# Altium PCB st_V1.PcbDoc
Units mil, origin at the board's own origin, x right, y up, seen from the top; angles counter-clockwise.
Board outline 3400 x 4549.85 mil, 2 copper layers (Top Layer, Bottom Layer); 43 components, 29 nets, 125 pads, 18 vias.
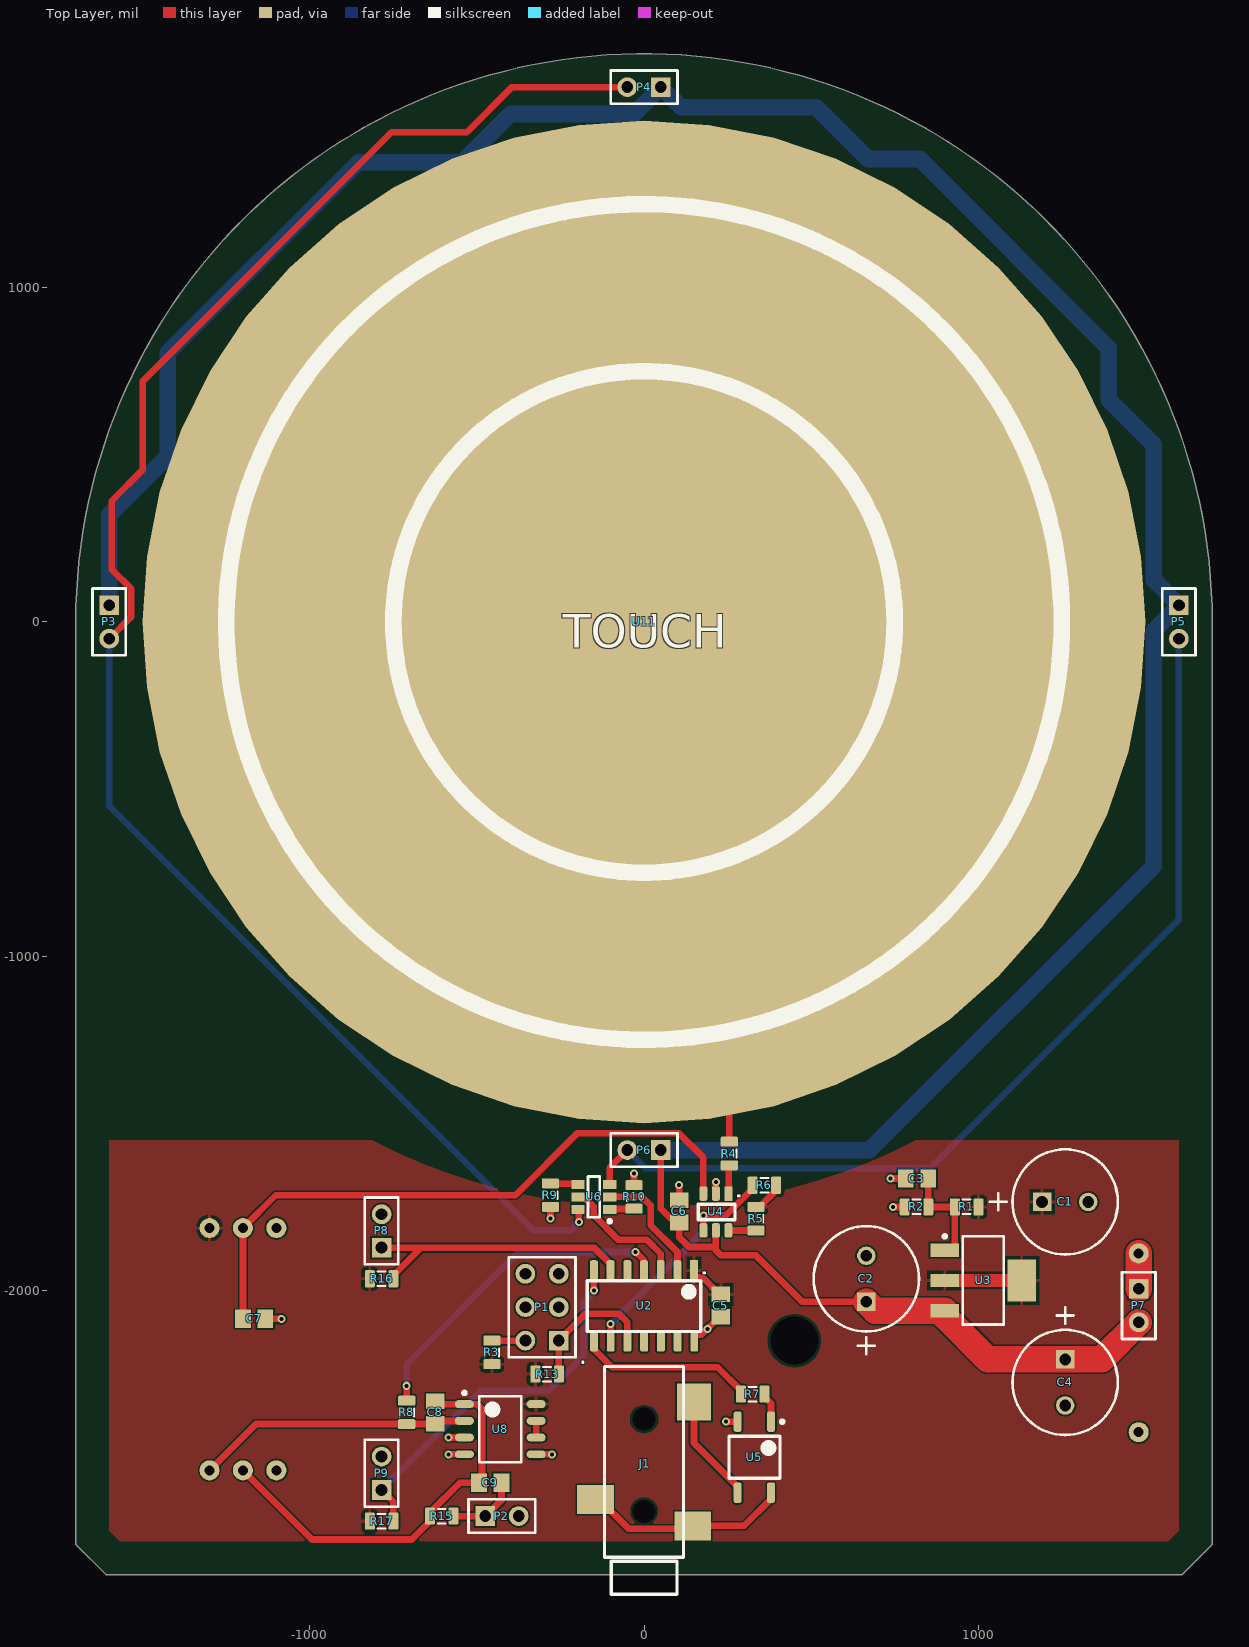
[diagram p0: Top Layer view]
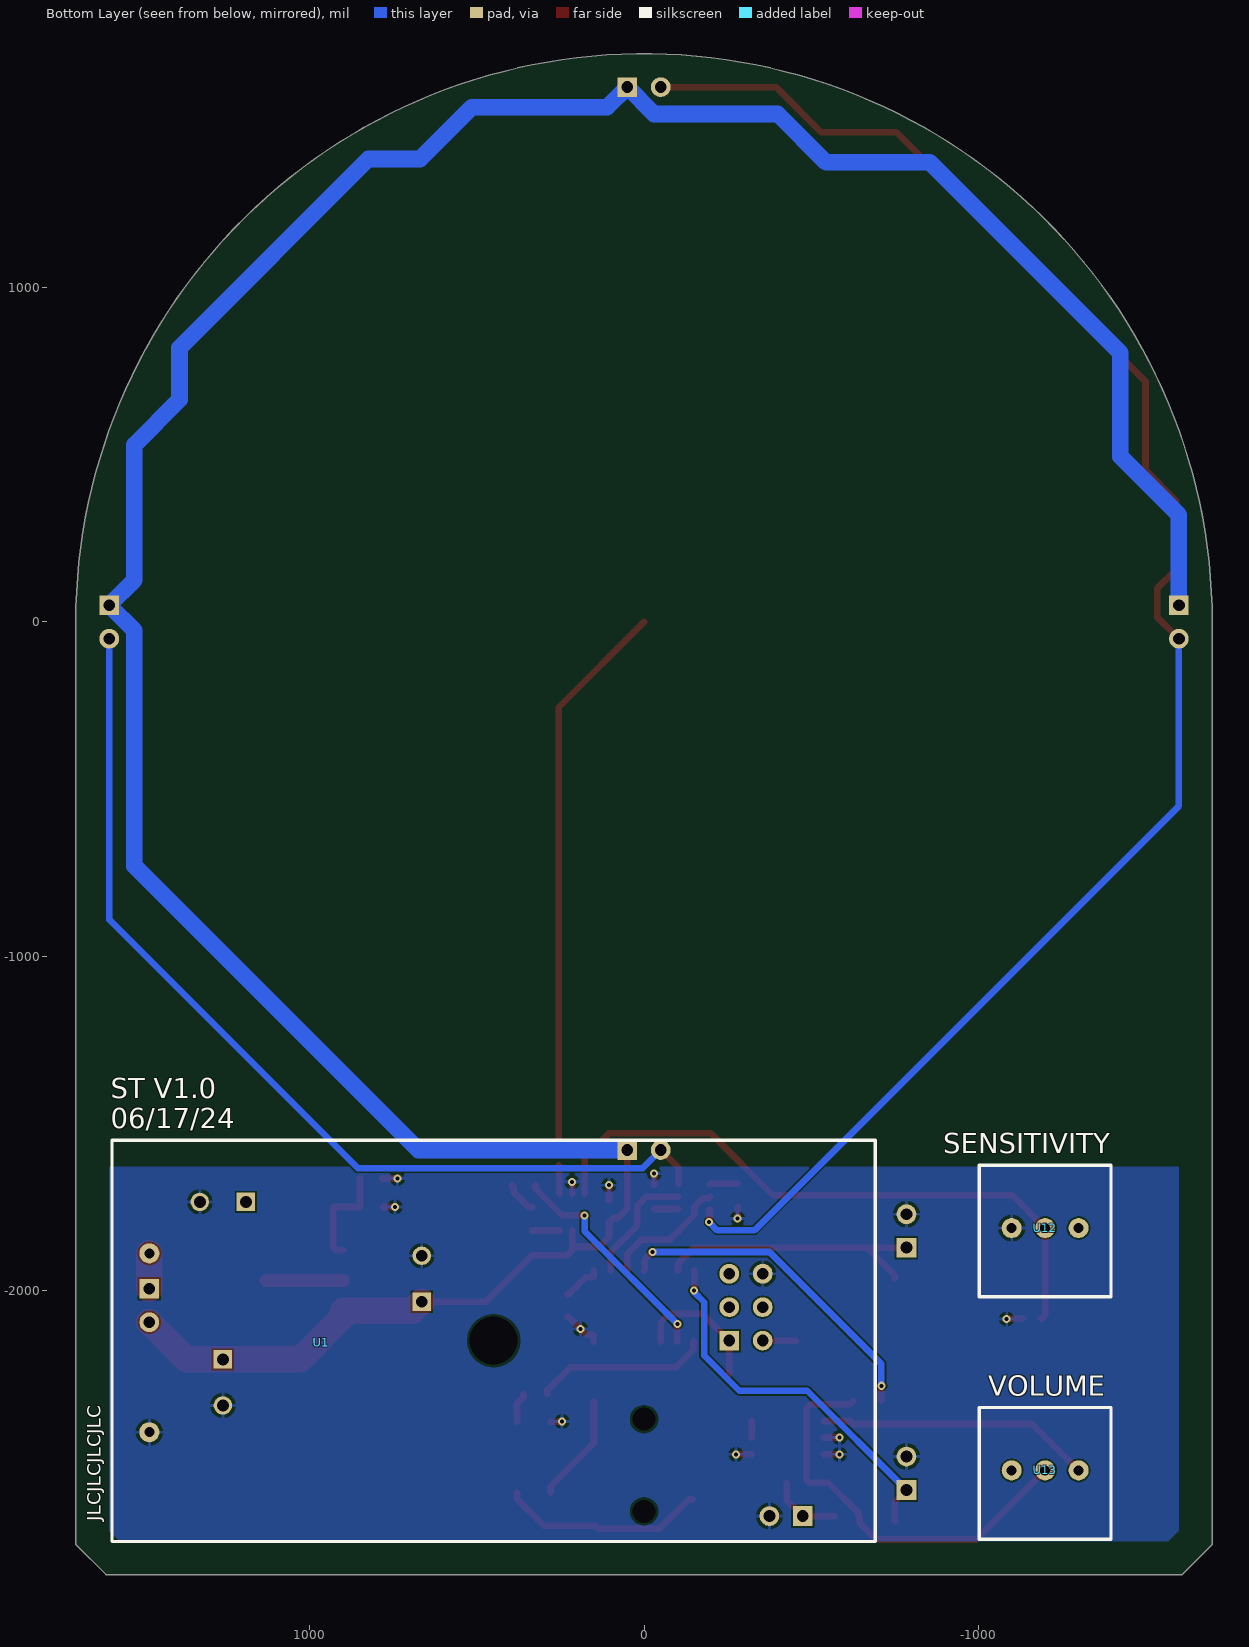
[diagram p1: Bottom Layer view, seen from below]
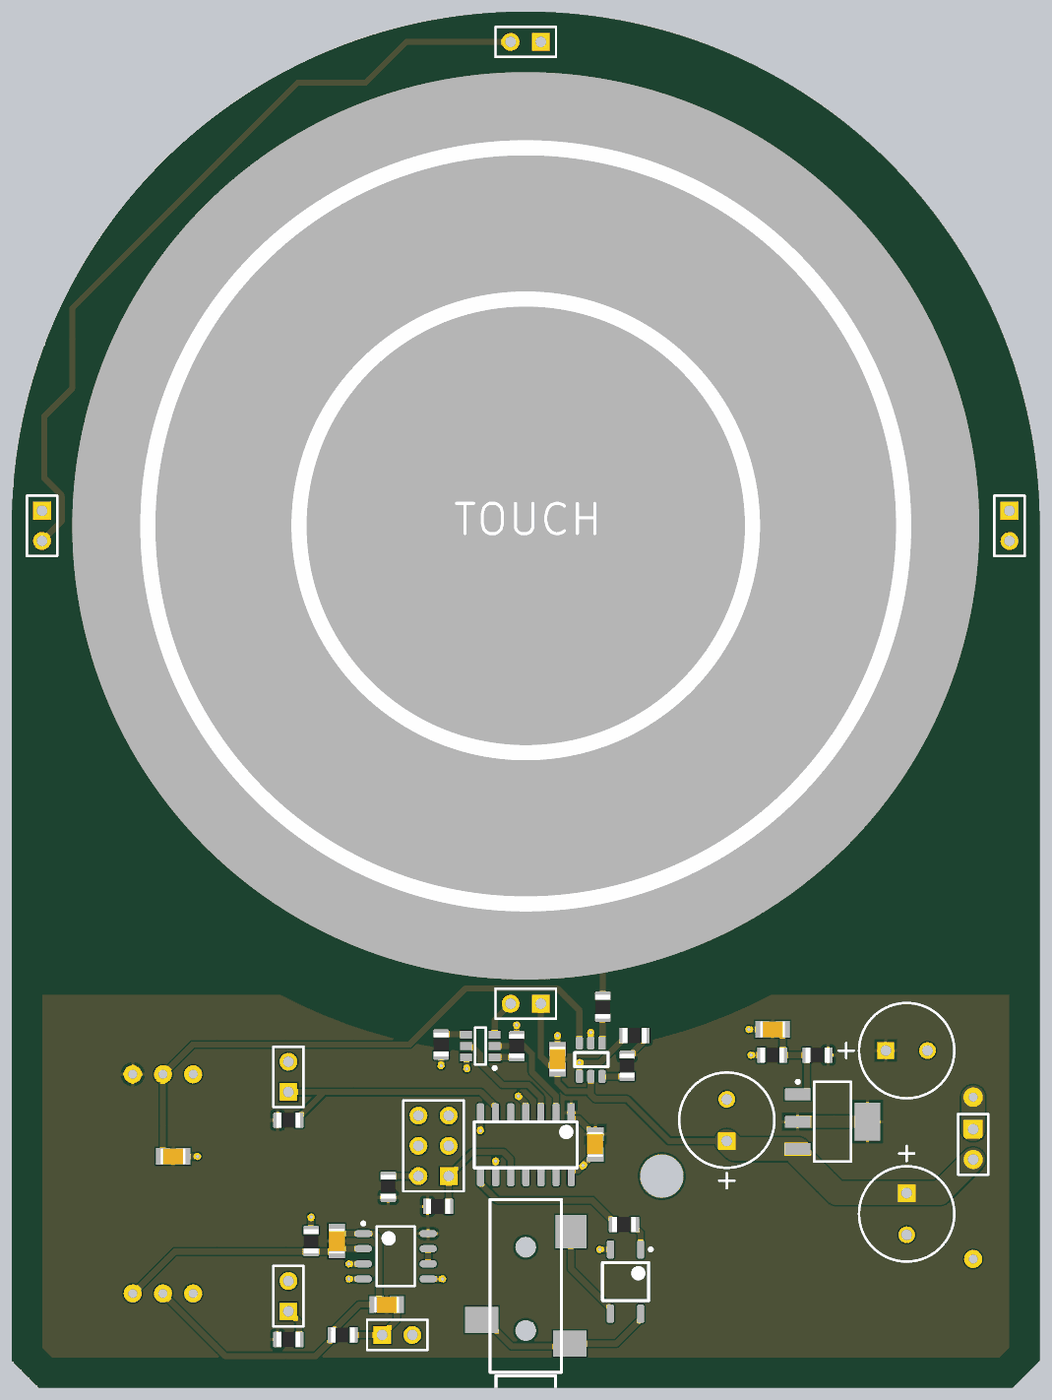
[diagram p2: 3D render of the assembled board from above, using the file's embedded part models]

## Layer stack, top to bottom
Top Solder: solder mask 0.4, Solder Resist, Dk 3.5
Top Layer: signal copper 1.4
Dielectric 1: dielectric 12.6, FR-4, Dk 4.8
Bottom Layer: signal copper 1.4
Bottom Solder: solder mask 0.4, Solder Resist, Dk 3.5

## Board outline
-1700,-2760 -1610,-2850 1610,-2850 1700,-2760 1700,0 ccw(c0,0) -1700,0

## Design rules (kind name [scope] priority, off if disabled: settings)
BoardOutlineClearance BoardOutlineClearance_1 [not OnLayer('Top Overlay')] p1: gap=15 ignorepadtopadclearanceinfootprint=FALSE except(0: Arc-SplitContinuation Track-SplitContinuation SMDPad-SplitContinuation THPad-SplitContinuation Via-SplitContinuation Fill-SplitContinuation Poly-SplitContinuation Region-SplitContinuation Text-SplitContinuation; 75: Poly-CutoutEdge; 100: Poly-OutlineEdge)
Clearance TOUCHPAD [InNet('1V8') or InNet('GND') vs InComponent('U11')] p1: gap=5 ignorepadtopadclearanceinfootprint=FALSE except(7.5: Arc-Hole Track-Hole SMDPad-Hole THPad-Hole Via-Hole Fill-Hole Poly-Hole Region-Hole Text-Hole; 250: SMDPad-Fill SMDPad-Poly SMDPad-Region)
Clearance [All] p2: gap=5 ignorepadtopadclearanceinfootprint=FALSE except(7.5: Arc-Hole Track-Hole SMDPad-Hole THPad-Hole Via-Hole Fill-Hole Poly-Hole Region-Hole Text-Hole)
ComponentClearance [All] p1 off: gap=10 collisioncheckmode=3 verticalgap=10 showdistances=FALSE
DiffPairsRouting [All] p1: maxlimit=5.5 minlimit=4.5 mostfreqgap=5 toplayer_minwidth=7 toplayer_maxwidth=8 toplayer_prefwidth=7.5 bottomlayer_minwidth=7 bottomlayer_maxwidth=8 bottomlayer_prefwidth=7.5 maxuncoupledlength=500
FabricationTestPointUsage TestPointUsage [All] p1: valid=0 allowmultiple=FALSE
FabricationTestpoint Testpoint [All] p1: side=3 testpointundercomponent=TRUE minsize=40 maxsize=100 preferedsize=60 minholesize=0 maxholesize=40 preferedholesize=32 testpointgrid=1 allowsidetop=TRUE allowsidebottom=TRUE usegrid=TRUE gridtolerance=0.01
MatchedLengths [All] p1: tolerance=100 checknetsindiffpair=TRUE checkdiffpairvsdiffpair=FALSE checkxsignals=FALSE checkothers=FALSE
MinimumAnnularRing [All] p1: minimumring=6
MinimumSolderMaskSliver [All] p1: minsoldermaskwidth=0
PlaneClearance [All] p1: clearance=7.5
PlaneConnect [All] p1: pad.planeconnectstyle=Relief pad.reliefexpansion=20 pad.reliefentries=4 pad.reliefconductorwidth=10 pad.reliefairgap=10 via.planeconnectstyle=Direct via.reliefexpansion=20 via.reliefentries=4 via.reliefconductorwidth=10 via.reliefairgap=10
PolygonConnect PolygonConnect_4 [All vs IsNamedPolygon('TIP_L02_P001')] p1: thpad.connectstyle=Relief thpad.reliefconductorwidth=20 thpad.reliefentries=4 thpad.polygonreliefangle="90 Angle" thpad.airgapwidth=10 smdpad.connectstyle=Relief smdpad.reliefconductorwidth=10 smdpad.reliefentries=4 smdpad.polygonreliefangle="90 Angle" smdpad.airgapwidth=10 via.connectstyle=Relief via.reliefconductorwidth=10 via.reliefentries=4 via.polygonreliefangle="90 Angle" via.airgapwidth=10
PolygonConnect PolygonConnect_3 [All vs IsNamedPolygon('TIP_L02_P001')] p2: thpad.connectstyle=Relief thpad.reliefconductorwidth=20 thpad.reliefentries=4 thpad.polygonreliefangle="90 Angle" thpad.airgapwidth=10 smdpad.connectstyle=Relief smdpad.reliefconductorwidth=10 smdpad.reliefentries=4 smdpad.polygonreliefangle="90 Angle" smdpad.airgapwidth=10 via.connectstyle=Relief via.reliefconductorwidth=10 via.reliefentries=4 via.polygonreliefangle="90 Angle" via.airgapwidth=10
PolygonConnect PolygonConnect_2 [All vs IsNamedPolygon('SLEEVE_L01_P000')] p3: thpad.connectstyle=Relief thpad.reliefconductorwidth=20 thpad.reliefentries=4 thpad.polygonreliefangle="90 Angle" thpad.airgapwidth=10 smdpad.connectstyle=Relief smdpad.reliefconductorwidth=10 smdpad.reliefentries=4 smdpad.polygonreliefangle="90 Angle" smdpad.airgapwidth=10 via.connectstyle=Relief via.reliefconductorwidth=10 via.reliefentries=4 via.polygonreliefangle="90 Angle" via.airgapwidth=10
PolygonConnect PolygonConnect_1 [All vs IsNamedPolygon('SLEEVE_L01_P000') Or IsNamedPolygon('TIP_L02_P001')] p4: thpad.connectstyle=Relief thpad.reliefconductorwidth=20 thpad.reliefentries=4 thpad.polygonreliefangle="90 Angle" thpad.airgapwidth=10 smdpad.connectstyle=Relief smdpad.reliefconductorwidth=10 smdpad.reliefentries=4 smdpad.polygonreliefangle="90 Angle" smdpad.airgapwidth=10 via.connectstyle=Relief via.reliefconductorwidth=10 via.reliefentries=4 via.polygonreliefangle="90 Angle" via.airgapwidth=10
PolygonConnect [All] p5: connectstyle=Relief reliefconductorwidth=10 reliefentries=4 polygonreliefangle="90 Angle" airgapwidth=10
RoutingVias [All] p1: holewidth=12 width=24 viastyle="Through Hole" minholewidth=12 minwidth=24 maxholewidth=12 maxwidth=24
SolderMaskExpansion [All] p1: expansion=1.97 istentingtop=FALSE
Width [All] p1: maxlimit=100 minlimit=5 preferedwidth=5 minimp=50.000000 maximp=50.000000 favimp=50.000000
23 further rules are at their usual default settings.

## Components (designator, comment, footprint, x,y, rotation, side; value= is the part's Value field where it differs from the comment)
C1 "ECA-2AM470" CAPPR65-350-1150X800X1250 1260,-1735 r0 top value=10u
C2 "ECA-2AM470" CAPPR65-350-1150X800X1250 665,-1965 r90 top value=10u
C3 "Capacitor 10 uF +/- 10% 16 V 0805" CAPC2013X135X45NL10T25 816.54,-1665 r180 top value=100n
C4 "ECA-2AM470" CAPPR65-350-1150X800X1250 1260,-2275 r270 top value=100u
C5 "Capacitor 10 uF +/- 10% 16 V 0805" CAPC2013X135X45NL10T25 230,-2045 r270 top value=100n
C6 "Capacitor 10 uF +/- 10% 16 V 0805" CAPC2013X135X45NL10T25 105,-1763.46 r90 top value=100n
C7 "Capacitor 10 uF +/- 10% 16 V 0805" CAPC2013X135X45NL10T25 -1166.54,-2085 r0 top value=100n
C8 "Capacitor 10 uF +/- 10% 16 V 0805" CAPC2013X135X45NL10T25 -625,-2365 r90 top value=100n
C9 "Capacitor 10 uF +/- 10% 16 V 0805" CAPC2013X135X45NL10T25 -460,-2575 r0 top value=1u
J1 "SJ-3523" SJ-352X 0,-2798.39 r90 top locked
P1 "Header 3X2" HDR2X3 -255,-2150 r90 top
P2 "Header 2" HDR1X2 -475,-2675 r0 top
P3 "Header 2" HDR1X2 -1600,50 r270 top
P4 "Header 2" HDR1X2 50,1600 r180 top
P5 "Header 2" HDR1X2 1600,50 r270 top
P6 "Header 2" HDR1X2 50,-1580 r180 top
P7 "POWER SWITCH" HDR1X2 1480,-1995 r270 top
P8 "POWER SWITCH" HDR1X2 -785,-1871.85 r90 top
P9 "POWER SWITCH" HDR1X2 -785,-2596.85 r90 top
R1 "1KR5J" RESC0805(2012)_L 965,-1750 r180 top value=100X
R2 "1KR5J" RESC0805(2012)_L 815,-1750 r180 top value=44X
R3 "1KR5J" RESC0805(2012)_L -455,-2185 r90 top value=0X
R4 "1KR5J" RESC0805(2012)_L 255,-1590 r90 top value=4.7KX
R5 "1KR5J" RESC0805(2012)_L 335,-1785 r90 top value=10KX
R6 "1KR5J" RESC0805(2012)_L 360,-1685 r0 top value=10KX
R7 "1KR5J" RESC0805(2012)_L 325,-2310 r180 top value=1KX
R8 "1KR5J" RESC0805(2012)_L -710,-2365 r270 top value=10KX
R9 "1KR5J" RESC0805(2012)_L -280,-1715 r270 top value=100
R10 "1KR5J" RESC0805(2012)_L -30,-1720 r90 top value=100
R13 "1KR5J" RESC0805(2012)_L -290,-2250 r180 top value=10KX
R15 "1KR5J" RESC0805(2012)_L -605,-2675 r0 top value=0X
R16 "1KR5J" RESC0805(2012)_L -785,-1965 r0 top value=10KX
R17 "1KR5J" RESC0805(2012)_L -785,-2690 r0 top value=10KX
U1 "2AA_BATTERY_PACK" 2AA_BATTERY_PACK 450,-2150 r0 bottom locked
U2 "ATtiny414" SOIC-14 150,-1940 r270 top
U3 "NCP1117" SOT-223 1015,-1970 r0 top
U4 "MTCH101" SOT-23-6 252.4,-1710 r270 top
U5 "CPC1017N" CPC1017N 380,-2605 r180 top
U6 "NUD3160" SC-74 -150,-1720 r180 top
U8 "TLV9062" SOIC-8 -430,-2415 r0 top
U11 "TOUCHPAD_3_IN" TOUCHPAD_3_IN 0,0 r0 top locked
U12 "TSR3386" TSR3386 -1200,-1625 r180 bottom
U13 "TSR3386" TSR3386 -1200,-2350 r180 bottom

## Footprints (in the part's own frame and the unit in brackets; to place one, negate y for a bottom-side part, rotate by r counter-clockwise, add the part's x,y. Pads: shape width x height; smd on the part's side, far side on the other; paste and mask are expansions set on the pad)
2AA_BATTERY_PACK [mil]
  round 60 hole 30: 1(1029.92,-261.02) 2(1029.92,274.02)
  round 0 hole 143.7: 55(0,0)
  silkscreen extent -1142,-600 1142,601
CAPC2013X135X45NL10T25 [mm] "Chip Capacitor, 2-Leads, Body 2.10x1.35mm, IPC Medium Density"
  rect 1.2x1.4 smd: 1(-0.85,0) 2(0.85,0)
  body extent -1.05,-0.67 1.05,0.67, height 1.35
CAPPR65-350-1150X800X1250 [mm] "THD, 2-Leads, Dia 8mm, Pin Spacing 3.5mm"
  rect 1.4x1.4 hole 0.9: 1(-1.75,0)
  round 1.4 hole 0.9: 2(1.75,0)
  silkscreen extent -5.71,-4 4,4, body extent -4,-4 3.95,4, height 12.5
CPC1017N [mm]
  rrect50% 0.6x1.54 smd: 1(0,-5.4) 2(2.54,-5.4) 3(2.54,0) 4(0,0)
  silkscreen extent -0.97,-5.52 3.2,-1.1
HDR1X2 [mm] "Connector; Header; 2 Position"
  rect 1.5x1.5 hole 0.9: 1(0,0)
  round 1.5 hole 0.9: 2(2.54,0)
  silkscreen extent -1.27,-1.27 3.81,1.27
HDR2X3 [mm] "Connector; Header; 3x2 Position"
  rect 1.5x1.5 hole 0.9: 1(0,0)
  round 1.5 hole 0.9: 2(0,2.54) 3(2.54,0) 4(2.54,2.54) 5(5.08,0) 6(5.08,2.54)
  silkscreen extent -1.27,-1.27 6.35,3.81
RESC0805(2012)_L [mm] "Chip Resistor, Body 2.0x1.3mm, IPC High Density"
  rrect25% 0.76x1.3 smd: 1(-0.9,0) 2(0.89,0)
  silkscreen extent -0.3,-0.55 0.3,0.55, body extent -1,-0.62 1,0.63, height 0.6
SC-74 [mm] "SOT23, 6-Leads, Body 3.00x2.75mm, Pitch 0.95mm, IPC Medium Density"
  rect 1x0.7 smd: 1(-1.2,0.95) 2(-1.2,0) 3(-1.2,-0.95) 4(1.2,-0.95) 5(1.2,0) 6(1.2,0.95)
  silkscreen extent -1.33,-1.55 0.45,1.97
SJ-352X [mm]
  rect 2.2x2.8 smd: 1(2.4,-3.7) 3(4.4,3.7)
  rect 2.8x2.6 smd: 2(11.8,-3.8)
  round 0 hole 1.75 unplated: ""(3.5,0) ""(10.5,0)
  silkscreen extent -2.8,-3 14.5,3
SOIC-8 [mm] "SOIC, 8-Leads, Body 4.90x3.90mm, Pitch 1.27mm, IPC Medium Density"
  oval 1.45x0.6 smd: 1(-2.725,1.905) 2(-2.725,0.635) 3(-2.725,-0.635) 4(-2.725,-1.905) 5(2.725,-1.905) 6(2.725,-0.635) 7(2.725,0.635) 8(2.725,1.905)
  silkscreen extent -2.85,-2.5 1.6,2.88
SOIC-14 [mm]
  rect 1.55x0.6 smd: 1(0,0)
  rrect50% 1.55x0.6 smd: 2(0,-1.27) 3(0,-2.54) 4(0,-3.81) 5(0,-5.08) 6(0,-6.35) 7(0,-7.62) 8(5.4,-7.61) 9(5.4,-6.34) 10(5.4,-5.07) 11(5.4,-3.8) 12(5.4,-2.53) 13(5.4,-1.26) 14(5.4,0.01)
  silkscreen extent 0.79,-8.14 4.64,0.5
SOT-23-6 [mm]
  rect 1.1x0.6 smd: 1(0,0)
  rrect50% 1.1x0.6 smd: 2(0,-0.95) 3(0,-1.9) 4(2.8,-1.9) 5(2.8,-0.95) 6(2.8,0)
  silkscreen extent 0.8,-2.3 2,0.5
SOT-223 [mm] "SOT223, 4-Leads, Body 6.50x7.00mm (avg), Pitch 2.30mm, IPC Medium Density"
  rect 2.15x1 smd: 1(-2.925,2.3) 2(-2.925,0) 3(-2.925,-2.3)
  rect 2.15x3.2 smd: 4(2.925,0)
  silkscreen extent -3.05,-3.35 1.55,3.47
TOUCHPAD_3_IN [mil]
  round 3000 smd paste+0 mask+0: 1(0,0)
TSR3386 [mil]
  round 60 hole 30: 1(100,-188.19) 2(0,-188.19) 3(-100,-188.19)
  silkscreen extent -197,-394 197,0

## Part data
C1 C2 C4: library part CMP-001-00036-6, "Aluminum Electrolytic Capacitor, 47 uF, +/- 20%, 100 V, -40 to 85 degC, 2-Pin THD, RoHS, Bulk", Capacitor Type=Electrolytic, Case/Package=Radial, Manufacturer=Panasonic, Max Operating Temperature=85°C, Min Operating Temperature=-40°C, Package Description="2-Pin Radial Lead, Dia 8 mm, Height 12.5 mm", Package Quantity=200, Package Reference=CAPPR65-350-1150X800X1250, Ripple Current=180mA, Tolerance=20%, Voltage Rating=100V, Datasheet URL=http://industrial.panasonic.com/cdbs/www-data/pdf/RDF0000/ABA0000C1047.pdf, Datasheet Version=Mar-16, Diameter=8mm, Lead Pitch=3.5mm, Manufacturer URL=http://www.panasonic.com/, Mounting Technology=TH, Packaging=Bulk, Pins=2, Ripple Current (AC)=180mA, RoHS Compliant=True
C3 C5 C6 C7 C8 C9: library part CMP-001-00015-5, "Chip Capacitor, 10 uF, +/- 10%, 16 V, 0805 (2012 Metric)", Capacitor Type=Ceramic, Case/Package=0805, Max Operating Temperature=85°C, Min Operating Temperature=-55°C, Tolerance=10%, Voltage Rating=16V, Mounting Technology=SM, Pins=2, RoHS Compliant=True
P1: library part CMP-002-00165-1, "Header, 3-Pin, Dual row", Component Type=Standard, Design Item ID="Header 3X2", LatestRevisionDate=17-Jul-2002, LatestRevisionNote="Re-released for DXP Platform.", Pins=6, Publisher="Altium Limited", Source="Miscellaneous Connectors.SchLib"
P2 P3 P4 P5 P6 P7 P8 P9: library part CMP-002-00141-1, "Header, 2-Pin", Component Type=Standard, Design Item ID="Header 2", LatestRevisionDate=17-Jul-2002, LatestRevisionNote="Re-released for DXP Platform.", Pins=2, Publisher="Altium Limited", Source="Miscellaneous Connectors.SchLib"
R1 R2 R3 R4 R5 R6 R7 R8 R9 R10 R13 R15 R16 R17: library part CMP-009-00076-1, "1K 0.125W 5% 0805 (2012 Metric)  SMD", Case/Package=0805, Power=0.125W, Tolerance=5%, Mounting Technology=SMT, Pins=2

## Via types
v1: diameter 24, hole 12, Top Layer to Bottom Layer, 18 vias

## Nets (pads, with @x,y where several pads share a name; then routed paths per layer and width w, separated by ;. In a path a pad name is that pad's centre, name@x,y a point inside that pad or via, vN(x,y) a via of type N, cw(c..) or ccw(c..) an arc to the next point about the centre after c; other vN are vias at no path point)
1V8: C1.1 C5.1 R1.1 R3.1 R5.2 R6.2 R13.2 R16.1 R17.1 U2.1 U3.2 U3.4 U8.8 U12.1 | length 447
  Top Layer w20: U2.1 150,-1958.7 151.81,-1960.51 175.04,-1960.51 226.06,-2011.54 C5.1 ; R5.2 345.63,-1749.96 390.08,-1705.51 390.08,-1689.96 R6.2
  Top Layer w40: U3.2 U3.4
3V: C2.1 C4.1 C6.1 P3.1 P4.1 P5.1 P6.1 P7.2 U3.3 U4.5 | length 9718.5
  Top Layer w20: P6.1 50,-1755 78.31,-1783.31 91.38,-1783.31 C6.1 105,-1840 135,-1870 215,-1870 ; U4.5 215,-1870 ; C2.1 473.9,-2033.9 335,-1895 230,-1895 215,-1880 215,-1870
  Top Layer w78.74: C2.1 691.65,-2060.55 U3.3 899.84,-2077.28 1028.66,-2206.1 C4.1 1368.9,-2206.1 P7.2
  Bottom Layer w50: P3.1 -1600,320 -1425,495 -1425,805 -855,1375 -545,1375 -400,1520 -30,1520 P4.1 110,1540 515,1540 670,1385 825,1385 1390,820 1390,665 1525,530 1525,125 P5.1 1525,-25 1525,-730 675,-1580 P6.1
BUZZ: R8.1 U2.4 | length 998.7
  Top Layer w20: R8.1 v1(-710,-2285) ; v1(-25,-1885) -1.81,-1908.19 -1.81,-1938.19 U2.4
  Bottom Layer w20: v1(-710,-2285) -710,-2220 -375,-1885 v1(-25,-1885)
BUZZ_CTL: P9.1 R17.2 U2.7 | length 1146.5
  Top Layer w20: P9.1 -749.96,-2631.89 R17.2 ; v1(-150,-2000) U2.7
  Bottom Layer w20: P9.1 -488.15,-2300 -285,-2300 -180,-2195 -180,-2035 -150.77,-2005.77 -150.77,-2000.77 v1(-150,-2000)
GND: C1.2 C2.2 C3.2 C4.2 C5.2 C6.2 C7.2 P1.6 P2.2 P8.2 P9.2 R2.2 R9.2 R10.2 U1.2 U2.14 U4.2 U5.2 U8.3 U8.4 U8.5 U12.3 | length 577.3
  Top Layer w20: C7.2 v1(-1085,-2085) ; v1(-585,-2490) U8.4 ; v1(-585,-2440) U8.3 ; U8.5 v1(-275,-2490) ; v1(-280,-1785) R9.2 ; R10.2 v1(-30,-1650) ; C6.2 v1(105,-1685) ; U2.14 150.39,-2133.9 152.2,-2132.09 172.44,-2132.09 226.06,-2078.46 C5.2 ; U4.2 v1(215,-1675.04) ; v1(245.04,-2392.4) U5.2 ; v1(738.07,-1665) C3.2 ; v1(745,-1750) R2.2
  other v1: 190,-2115
LED0: P3.2 P4.2 U6.6 | length 5154.1
  Top Layer w20: P3.2 -1535,15 -1535,99.75 -1592.28,157.02 -1592.28,362.72 -1500,455 -1500,720 -755,1465 -530,1465 -395,1600 P4.2 ; U6.6 -195.77,-1758.88 -195.77,-1794.23 v1(-195,-1795)
  Bottom Layer w20: P3.2 -1600,-550 -330,-1820 -218.72,-1820 -197,-1798.28 -197,-1798.08 -195,-1796.08 v1(-195,-1795)
LED1: P5.2 P6.2 U6.3 | length 2945.3
  Top Layer w20: U6.3 -102.76,-1632.76 P6.2
  Bottom Layer w20: P6.2 4.37,-1634.37 855.63,-1634.37 1600,-890 P5.2
LED_CTL: P8.1 R16.2 U2.6 | length 847.6
  Top Layer w20: P8.1 -149.45,-1871.85 -101.81,-1919.49 -101.81,-1938.19 U2.6 ; R16.2 -749.96,-1954.37 -745,-1949.41 -744.41,-1949.41 -670,-1875
NetC3_1: C3.1 R1.2 R2.1 U3.1 | length 318.6
  Top Layer w20: C3.1 850.22,-1665.22 850.22,-1749.78 R2.1 R1.2 929.96,-1869.76 920.28,-1879.45 U3.1
NetC7_1: C7.1 U4.3 U12.2 | length 1909
  Top Layer w20: C7.1@-1188.46,-2085 -1200,-2073.46 U12.2 -1101.81,-1715 -385,-1715 -200,-1530 105,-1530 177.6,-1602.6 U4.3
NetC8_1: C8.1 R8.2 U8.2 U13.1 | length 824.1
  Top Layer w20: U13.1 -1161.06,-2399.25 -625.79,-2399.25 C8.1 -617.23,-2390.69 -537.98,-2390.69 U8.2
NetC8_2: C8.2 C9.1 R15.1 U8.1 U13.2 | length 1251.1
  Top Layer w20: U13.2 -993.19,-2745 -695,-2745 -645.39,-2695.39 -645.39,-2679.96 R15.1 -640.43,-2664.37 -551.06,-2575 C9.1 -485,-2566.54 -485,-2355 -500,-2340 -616.54,-2340 C8.2
NetC9_2: C9.2 P2.1 R15.2 | length 215
  Top Layer w20: R15.2 P2.1 -426.54,-2626.54 C9.2
NetJ1_1: J1.1 J1.3 U5.4 | length 617.2
  Top Layer w20: J1.3 -133.86,-2625.16 -46.48,-2712.54 137.03,-2712.54 J1.1 299.61,-2703.9 380,-2623.5 U5.4
NetJ1_2: J1.2 U5.3 | length 325.2
  Top Layer w20: J1.2 149.61,-2456.1 280,-2586.5 U5.3
NetP1_2: P1.2 R3.2 | length 100
  Top Layer w20: R3.2 P1.2
NetP7_1: P7.1 U1.1 | length 106.1
  Top Layer w78.74: U1.1 1479.92,-1994.92 P7.1
NetR4_1: R4.1 U4.1 | length 85.6
  Top Layer w20: U4.1 253.7,-1708.7 253.7,-1626.73 R4.1
NetR5_1: R5.1 U4.6 | length 82.7
  Top Layer w20: U4.6 252.5,-1820.33 334.9,-1820.33 R5.1
NetR7_1: R7.1 U5.1 | length 92.2
  Top Layer w20: R7.1 360.43,-2320.63 365.39,-2325.59 368.28,-2325.59 380,-2337.31 U5.1
NetR9_1: R9.1 U6.4 | length 84
  Top Layer w20: R9.1 -278.48,-1681.08 -198.76,-1681.08 U6.4
NetR10_1: R10.1 U6.1 | length 73.6
  Top Layer w20: U6.1 -101.77,-1756.42 -30.98,-1756.42 R10.1
NetU8_6: U8.6 U8.7 | length 50
  Top Layer w20: U8.6 U8.7
PRESS: R7.2 U2.8 | length 524.3
  Top Layer w20: U2.8 -147.8,-2154.41 -147.8,-2177.2 -95,-2230 220.59,-2230 289.96,-2299.37 R7.2
RESETn: P1.1 R13.1 U2.10 | length 406.4
  Top Layer w20: R13.1 -254.78,-2249.78 -254.78,-2150.22 P1.1 -175,-2070 -75,-2070 -49.86,-2095.14 -49.86,-2152.34 U2.10
SENSE: R6.1 U2.9 U4.4 | length 728.1
  Top Layer w20: U2.9 v1(-99.61,-2100) ; U4.4 v1(177.6,-1775) 245.2,-1775 324.57,-1695.63 R6.1
  Bottom Layer w20: v1(-99.61,-2100) 177.6,-1822.8 v1(177.6,-1775)
TOUCHPAD: R4.2 U11.1 | length 1660.6
  Top Layer w20: U11.1 255,-255 R4.2
uP_LED0: U2.2 U6.2 | length 360.7
  Top Layer w20: U6.2 -5.86,-1720 20,-1745.86 20,-1805 100,-1885 U2.2
uP_LED1: U2.3 U6.5 | length 382.3
  Top Layer w20: U6.5 -193.46,-1723.78 -176.19,-1723.78 -150,-1749.97 -150,-1775 -76.56,-1848.44 8.44,-1848.44 50,-1890 U2.3
pads on no net: J1. P1.3 P1.4 P1.5 U1.55 U2.5 U2.11 U2.12 U2.13 U13.3

## Polygon pours and split planes (outlines as drawn)
1V8 on Top Layer "1V8_L01_P004" (solid, pour order 4): -1700,-1550 1700,-1550 1700,-2850 -1700,-2850
GND on Bottom Layer "GND_L02_P005" (solid, pour order 5): -1700,-1630 1700,-1630 1700,-2850 -1700,-2850

## Silkscreen, mask and mechanical layers (free items; w line width, h text height)
Top Overlay:
  circle w50: c0,0 r750
  circle w50: c0,0 r1250
  text "TOUCH" at -243.29,-76.65 h100
  text "." at -195,-2220 h60
Bottom Overlay:
  text "ST V1.0" at 1595,-1425 h60
  text "06/17/24" at 1595,-1515 h60
  text "SENSITIVITY" at -895.1,-1590 h60
  text "VOLUME" at -1030.05,-2315 h60
  text "JLCJLCJLCJLC" at 1625,-2690 h40 r270
Mechanical 1:
  the board outline again, w10